# Altium PCB PCB1.PcbDoc
Units mil, origin at the board's own origin, x right, y up, seen from the top; angles counter-clockwise.
Board outline 3250 x 2500 mil, 2 copper layers (Top Layer, Bottom Layer); 7 components, 22 nets, 47 pads, 10 vias.
Unrouted connection lines stored in the file: 1.
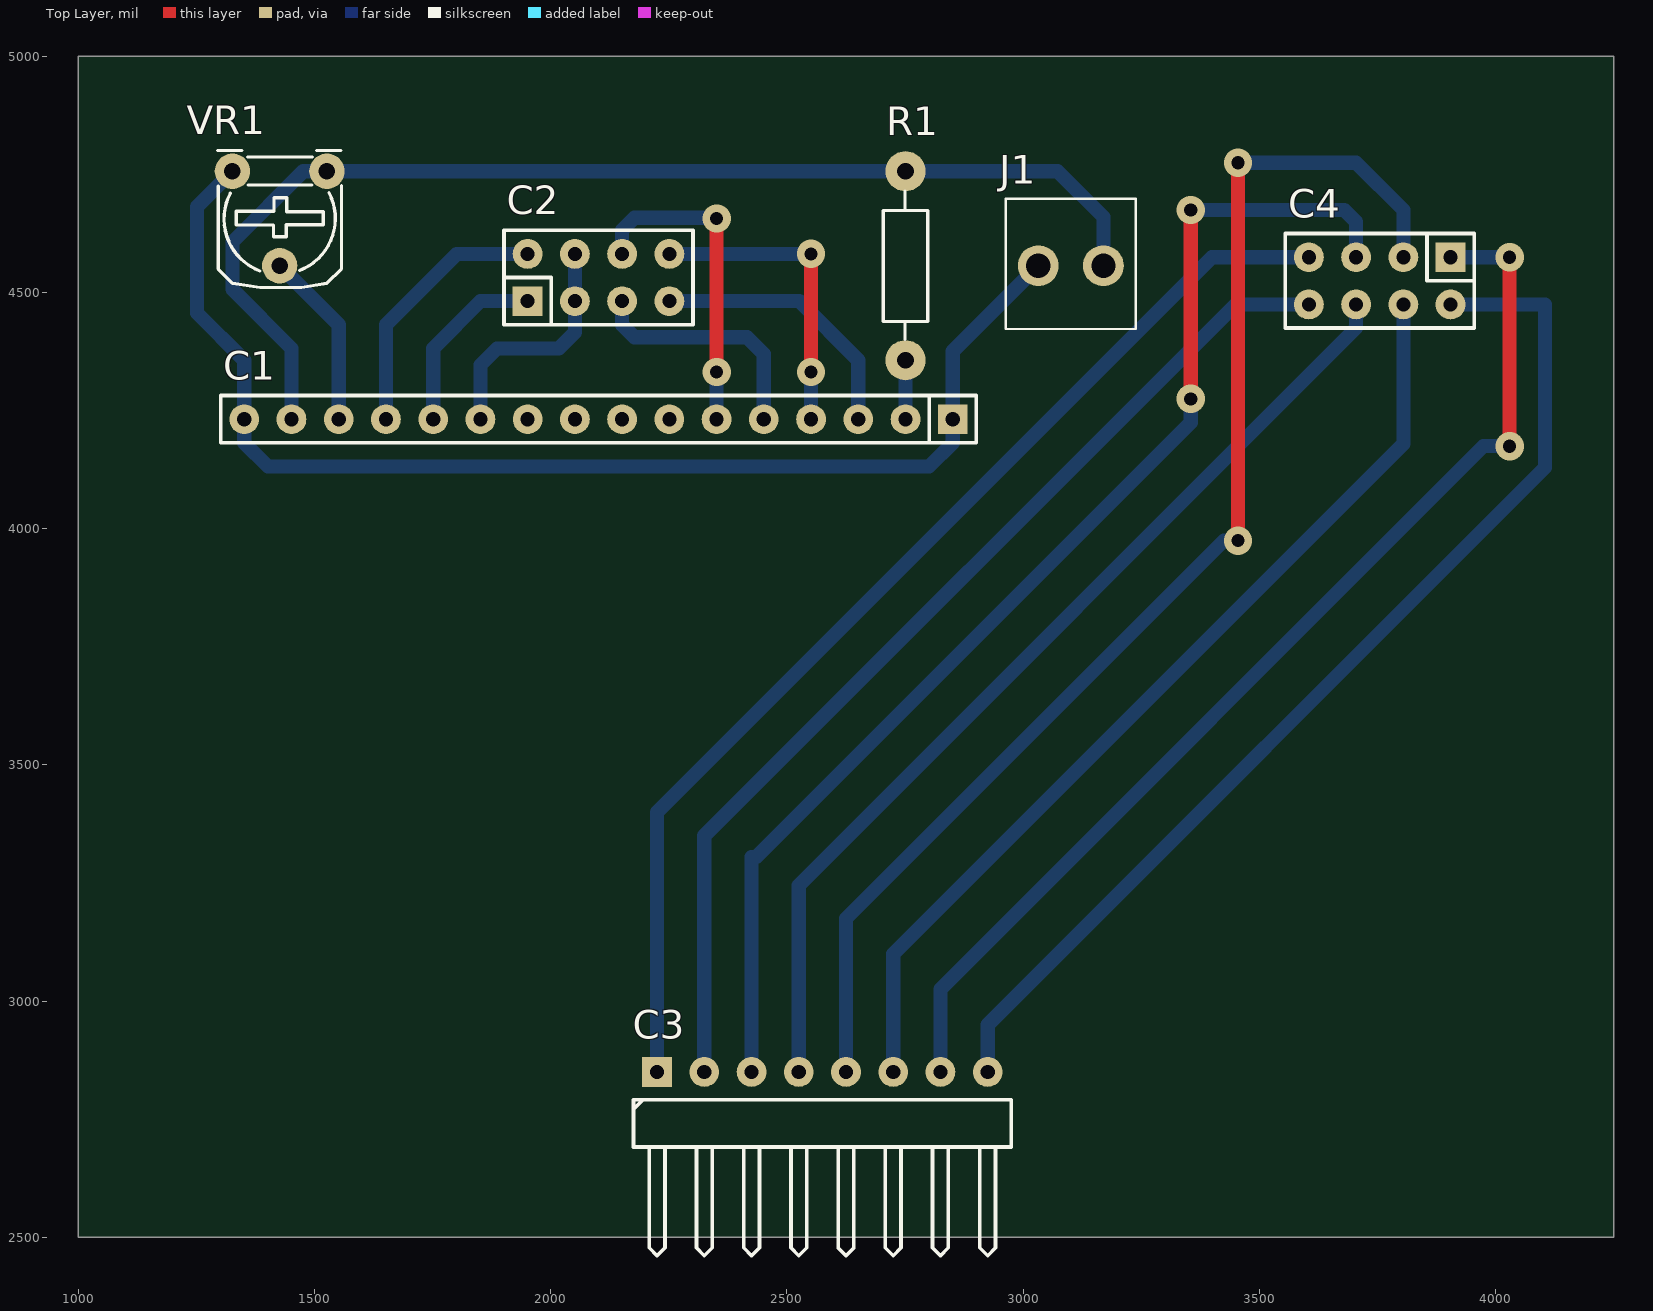
[diagram p0: Top Layer view]
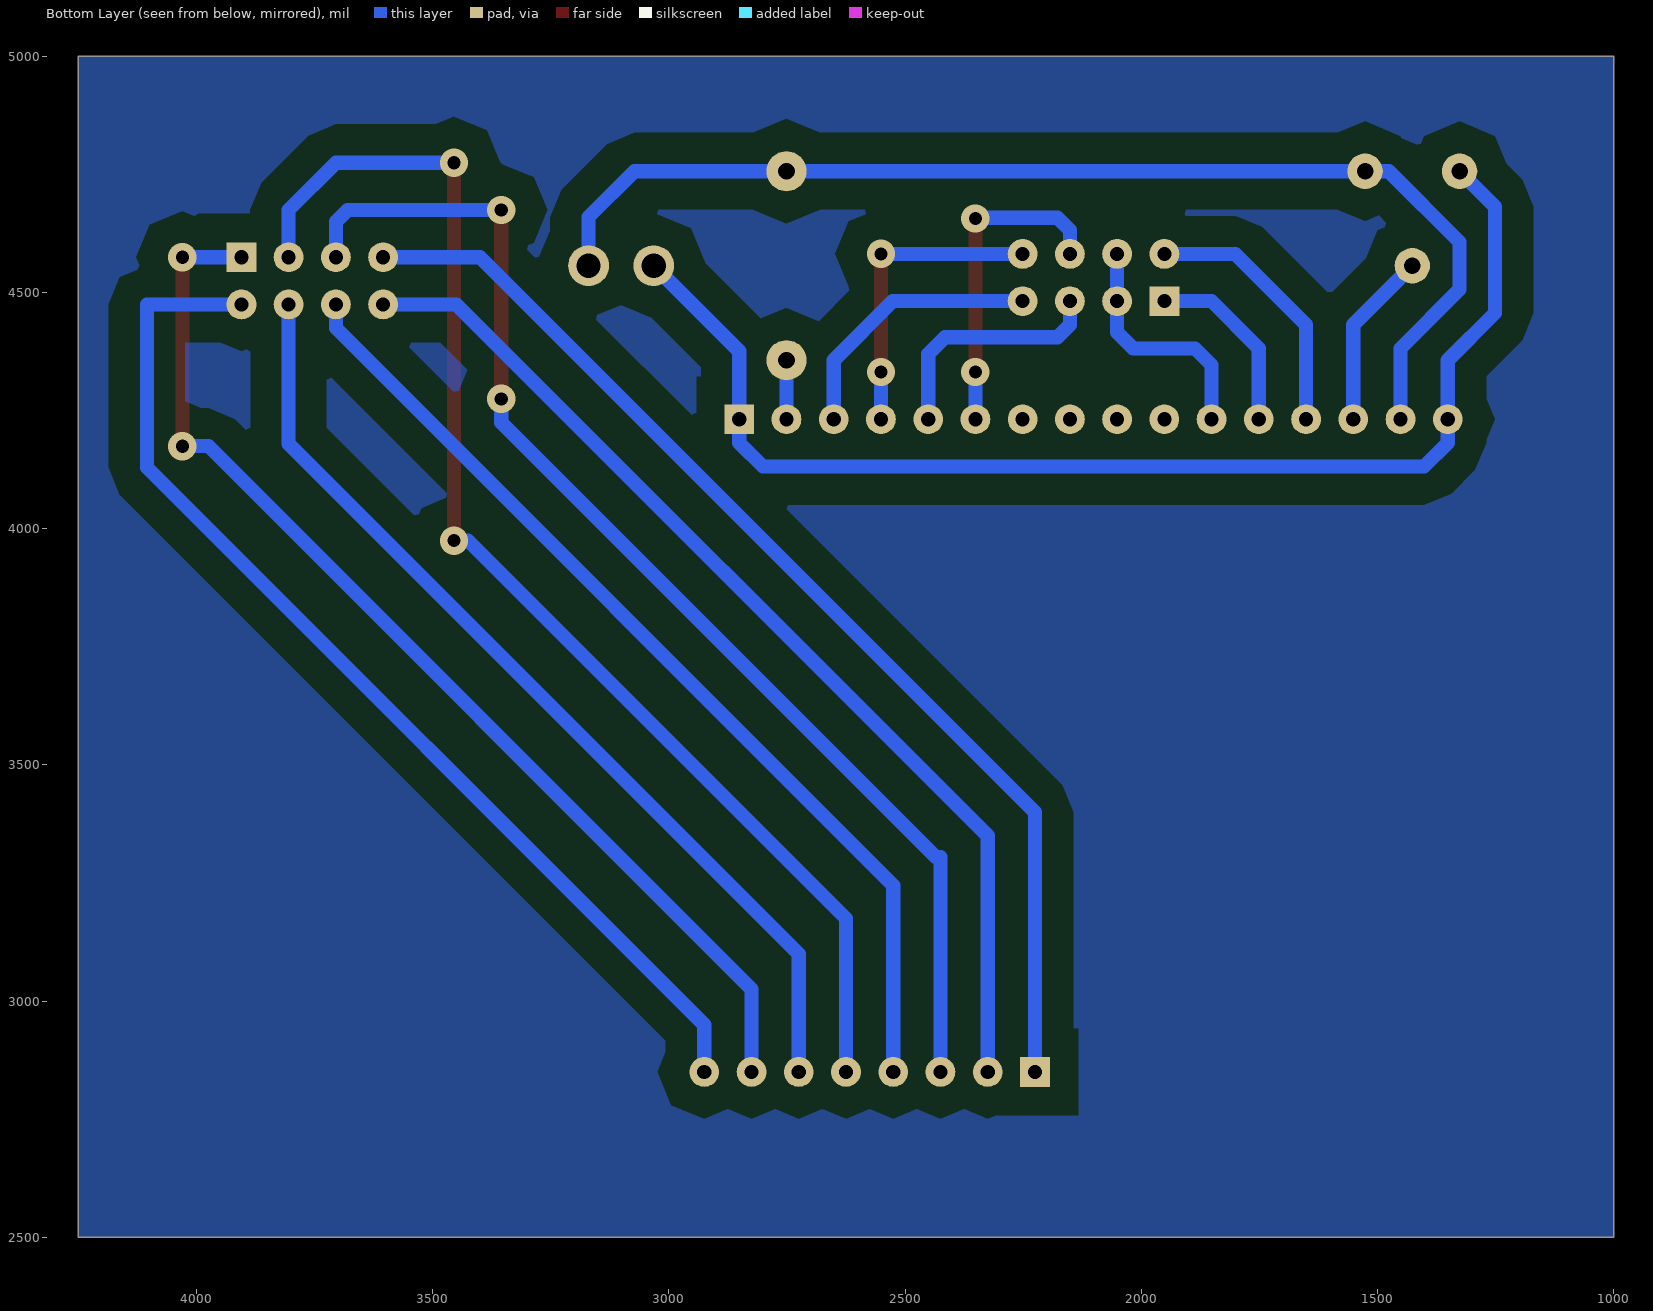
[diagram p1: Bottom Layer view, seen from below]
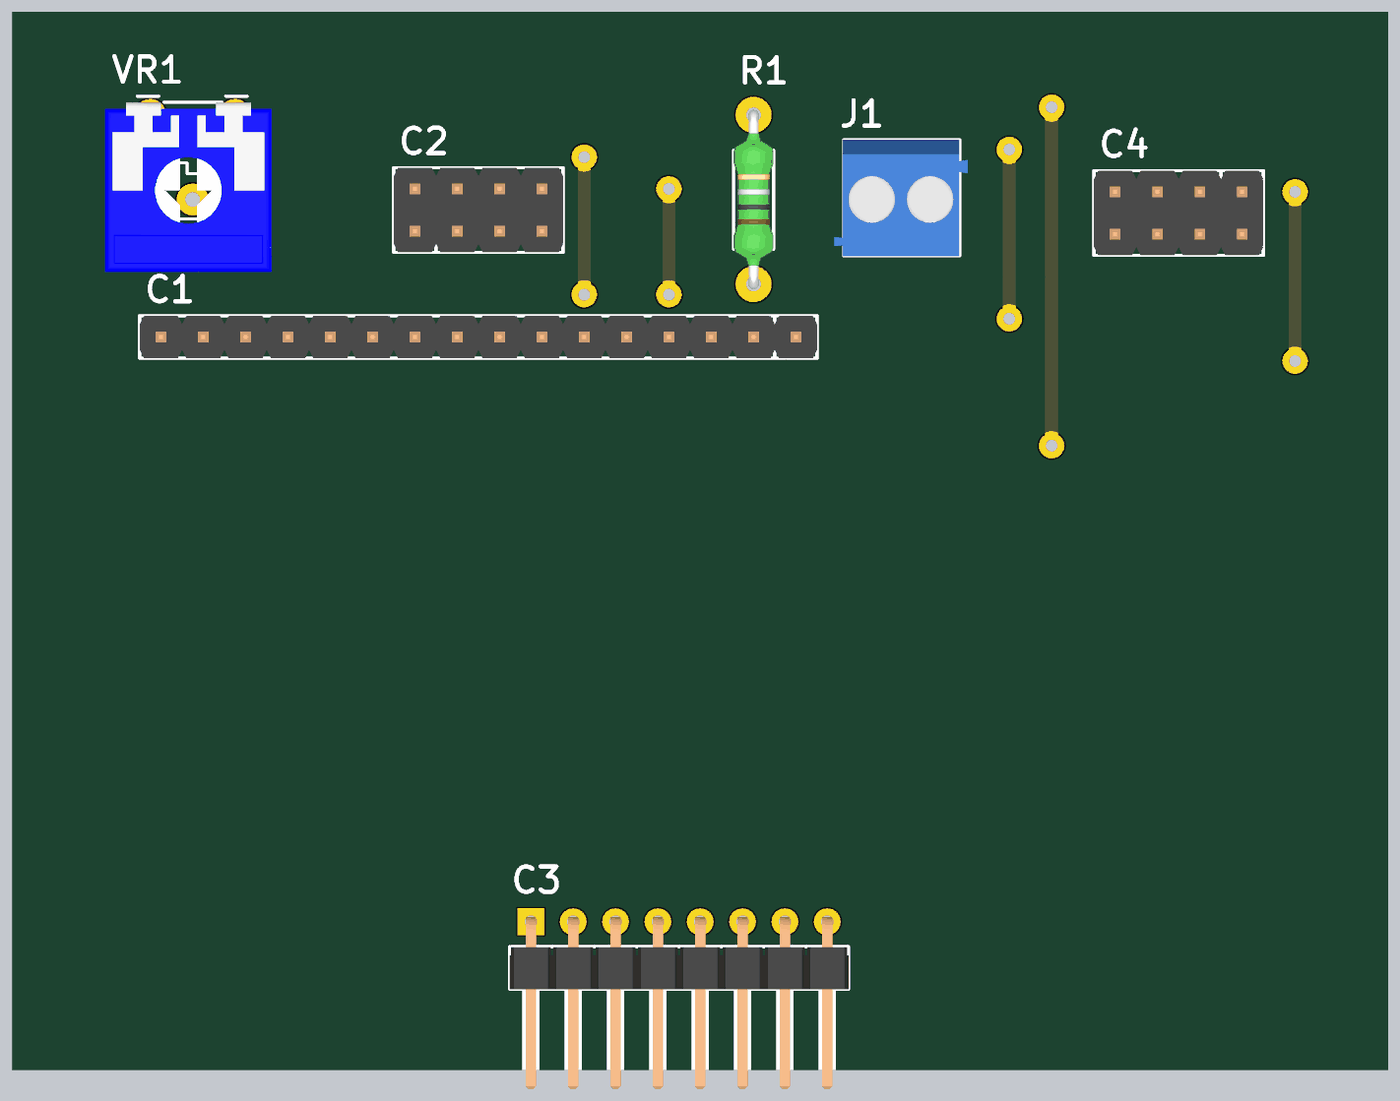
[diagram p2: 3D render of the assembled board from above, using the file's embedded part models]

## Layer stack, top to bottom
Top Solder: solder mask 0.4, Solder Resist, Dk 3.5
Top Layer: signal copper 1.4
Dielectric 1: dielectric 12.6, FR-4, Dk 4.8
Bottom Layer: signal copper 1.4
Bottom Solder: solder mask 0.4, Solder Resist, Dk 3.5

## Board outline
1000,2500 1000,5000 4250,5000 4250,2500

## Design rules (kind name [scope] priority, off if disabled: settings)
Clearance Clearance_1 [All vs InPolygon] p1: gap=60
Clearance [InPolygon] p2: gap=60
PolygonConnect [All] p1: connectstyle=Relief reliefconductorwidth=10 reliefentries=4 polygonreliefangle="90 Angle" airgapwidth=10
RoutingVias [All] p1: holewidth=28 width=80 viastyle="Through Hole" minholewidth=28 minwidth=80 maxholewidth=28 maxwidth=80
SolderMaskExpansion [All] p1: expansion=4
Width [All] p1: maxlimit=30 minlimit=20 preferedwidth=30
30 further rules are at their usual default settings.

## Components (designator, comment, footprint, x,y, rotation, side; value= is the part's Value field where it differs from the comment)
C1 "JP16" JP16-D1T 2851,4232 r180 top
C2 "JP4x2" JP4-D2T 2101,4532 r0 top
C3 "JP8" JP8-D1C 2975,2750 r0 top
C4 "JP4x2" JP4-D2T 3755,4525 r180 top
J1 "KF2" KF2-3.5 3101,4557 r180 top
R1 "Res" RES-1/4W 2746,4542 r270 top
VR1 "50K" VR-S2 1526,4757 r180 top

## Footprints (in the part's own frame and the unit in brackets; to place one, negate y for a bottom-side part, rotate by r counter-clockwise, add the part's x,y. Pads: shape width x height; smd on the part's side, far side on the other; paste and mask are expansions set on the pad)
JP4-D2T [mm] "8 pins, dual pin, straight, gold plating"
  rect 1.61x1.6 hole 0.762: 1(-3.81,-1.27)
  oval 1.61x1.6 hole 0.762: 2(-1.27,-1.27) 3(1.27,-1.27) 4(3.81,-1.27) 5(3.81,1.27) 6(1.27,1.27) 7(-1.27,1.27) 8(-3.81,1.27)
  silkscreen extent -5.08,-2.54 5.08,2.54, body extent -5.08,-2.54 5.08,2.54, height 8.55
JP8-D1C [mm] "8 pins, 1 row, right angled, gold plating"
  rect 1.6x1.6 hole 0.762: 1(-19.05,2.54)
  round 1.6 hole 0.762: 2(-16.51,2.54) 3(-13.97,2.54) 4(-11.43,2.54) 5(-8.89,2.54) 6(-6.35,2.54) 7(-3.81,2.54) 8(-1.27,2.54)
  silkscreen extent -20.32,-7.34 0,1.04, body extent -20.32,-7.52 0,2.84, height 2.55
JP16-D1T [mm] "16  pins, 1 row, straight, gold plating"
  rect 1.6x1.6 hole 0.762: 1(0,0)
  round 1.6 hole 0.762: 2(2.54,0) 3(5.08,0) 4(7.62,0) 5(10.16,0) 6(12.7,0) 7(15.24,0) 8(17.78,0) 9(20.32,0) 10(22.86,0) 11(25.4,0) 12(27.94,0) 13(30.48,0) 14(33.02,0) 15(35.56,0) 16(38.1,0)
  silkscreen extent -1.27,-1.27 39.37,1.27, body extent -1.27,-1.27 39.37,1.27, height 8.54
KF2-3.5 [mm] "3,50mm - modular - blue - Horizontal wire entry - Pressure clamp - 8,4mm height - 02p"
  round 2.2 hole 1.3: 1(-1.75,0) 2(1.75,0)
  silkscreen extent -3.5,-3.6 3.5,3.4, body extent -3.95,-3.6 4.05,3.4, height 8.41
RES-1/4W [mil]
  round 85 hole 35: 1(-215,5) 2(185,5)
  silkscreen extent -173,-42 141,52, body extent -227,-42 197,52, height 95
VR-S2 [mil] "Resistor Variable"
  round 75 hole 35: 1(0,0) 2(100,200) 3(200,0)
  silkscreen extent -31,-44 231,246, body extent -87,-30 307,372, height 165

## Part data
C1 C3: "WR-PHD 2.54 mm Angled Socket Header"
C2 C4: "WR-PHD 2.54 mm Dual Socket Header"
VR1: library part VR-S, "Var Resistor"

## Via types
v1: diameter 60, hole 28, Top Layer to Bottom Layer, 10 vias

## Nets (pads, with @x,y where several pads share a name; then routed paths per layer and width w, separated by ;. In a path a pad name is that pad's centre, name@x,y a point inside that pad or via, vN(x,y) a via of type N, cw(c..) or ccw(c..) an arc to the next point about the centre after c; other vN are vias at no path point)
GND: C1.1 C1.16 J1.2 VR1.3 | length 2638.9
  Bottom Layer w30: VR1.3 1251,4682 1251,4457 1351,4357 C1.16 1351,4182 1401,4132 2801,4132 2851,4182 C1.1 2851,4375.9 J1.2
NetC1_2: C1.2 C3.8 C4.8 R1.2 | length 2438.8
  Bottom Layer w30: C1.2 R1.2 ; C3.8 2925,2950 4105,4130 4105,4475 C4.8
NetC1_3: C1.3 C2.4 | length 576.8
  Bottom Layer w30: C2.4 2526,4482 2651,4357 C1.3
NetC1_4: C1.4 C2.5 | length 650
  Top Layer w30: v1(2551,4332) v1(2551,4582)
  Bottom Layer w30: C2.5 v1(2551,4582) ; C1.4 v1(2551,4332)
NetC1_5: C1.5 C2.3 | length 513.7
  Bottom Layer w30: C2.3 2151,4432 2177.5,4405.5 2415.5,4405.5 2451,4370 C1.5
NetC1_6: C1.6 C2.6 | length 686.6
  Top Layer w30: v1(2351,4332) v1(2351,4657)
  Bottom Layer w30: C2.6 2151,4632 2177.5,4658.5 2349.5,4658.5 v1(2351,4657) ; C1.6 v1(2351,4332)
NetC1_7: C1.7
NetC1_8: C1.8
NetC1_9: C1.9
NetC1_10: C1.10
NetC1_11: C1.11 C2.2 C2.7 | length 509.6
  Bottom Layer w30: C1.11 1851,4347 1886,4382 2017,4382 2051,4416 C2.2 C2.7
NetC1_12: C1.12 C2.1 | length 391.4
  Bottom Layer w30: C1.12 1751,4382 1851,4482 C2.1
NetC1_13: C1.13 C2.8 | length 562.1
  Bottom Layer w30: C1.13 1651,4432 1801,4582 C2.8
NetC1_14: C1.14 VR1.2 | length 376.8
  Bottom Layer w30: VR1.2 1551,4432 C1.14
NetC3_1: C3.1 C4.4 | length 2416.7
  Bottom Layer w30: C3.1 2225,3400 3400,4575 C4.4
NetC3_2: C3.2 C4.5 | length 2246
  Bottom Layer w30: C3.2 2325,3350 3450,4475 C4.5
NetC3_3: C3.3 C4.3 | length 2651.4
  Top Layer w30: v1(3355,4275) v1(3355,4675)
  Bottom Layer w30: C3.3 2425,3305 2435,3305 3355,4225 v1(3355,4275) ; v1(3355,4675) 3680,4675 3705,4650 C4.3
NetC3_4: C3.4 C4.6 | length 2113.8
  Bottom Layer w30: C3.4 2525,3245 3705,4425 C4.6
NetC3_5: C3.5 C4.2 | length 2777.8
  Top Layer w30: v1(3455,3975) v1(3455,4775)
  Bottom Layer w30: C3.5 2625,3175 3425,3975 v1(3455,3975) ; v1(3455,4775) 3705,4775 3805,4675 C4.2
NetC3_6: C3.6 C4.7 | length 2072.4
  Bottom Layer w30: C3.6 2725,3100 3805,4180 C4.7
NetC3_7: C3.7 C4.1 | length 2381.3
  Top Layer w30: v1(4030,4175) v1(4030,4575)
  Bottom Layer w30: C3.7 2825,3025 3975,4175 v1(4030,4175) ; C4.1 v1(4030,4575)
VCC: C1.15 J1.1 R1.1 VR1.1 | length 2476
  Bottom Layer w30: C1.15 1451,4382 1326,4507 1326,4607 1476,4757 VR1.1 R1.1 3073,4757 3169.9,4660.1 J1.1

## Polygon pours and split planes (outlines as drawn)
no net on Bottom Layer "Mechanical 1-No Net" (solid, pour order 5): 1000,5000 4250,5000 4250,2500 1000,2500 1000,5000